# Altium PCB PCB1.PcbDoc
Units mm, origin at the board's own origin, x right, y up, seen from the top; angles counter-clockwise.
Board outline 152.4 x 101.6 mm, 2 copper layers (Top Layer, Bottom Layer); 4 components, 3 nets, 10 pads, 0 vias.
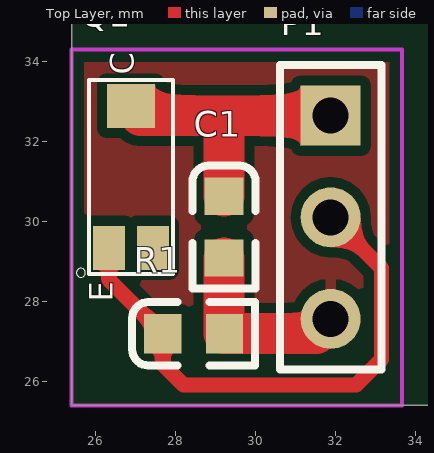
[diagram p0: Top Layer view]
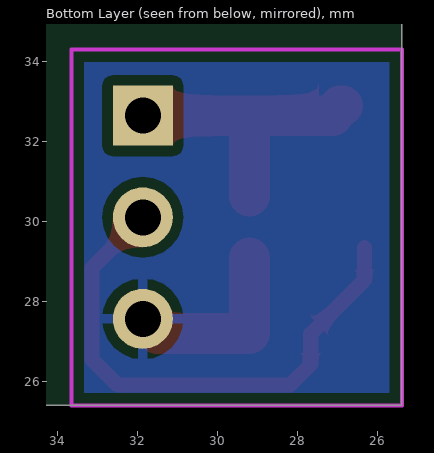
[diagram p1: Bottom Layer view, seen from below]

## Layer stack, top to bottom
Top Solder: solder mask 0.0102, Solder Resist, Dk 3.5
Top Layer: signal copper 0.0356
Dielectric 1: dielectric 0.32, FR-4, Dk 4.8
Bottom Layer: signal copper 0.0356
Bottom Solder: solder mask 0.0102, Solder Resist, Dk 3.5

## Board outline
25.4,25.4 177.8,25.4 177.8,127 25.4,127

## Design rules (kind name [scope] priority, off if disabled: settings)
Clearance [All] p1: gap=0.254 ignorepadtopadclearanceinfootprint=FALSE except(0: Arc-Hole Track-Hole SMDPad-Hole THPad-Hole Via-Hole Fill-Hole Poly-Hole Region-Hole Text-Hole)
PolygonConnect [All] p1: connectstyle=Relief reliefconductorwidth=0.254 reliefentries=4 polygonreliefangle="90 Angle" airgapwidth=0.254
RoutingVias [All] p1: holewidth=0.711 width=1.27 viastyle="Through Hole" minholewidth=0.711 minwidth=1.27 maxholewidth=0.711 maxwidth=1.27
SolderMaskExpansion [All] p1: expansion=0.102
Width [All] p1: maxlimit=1.016 minlimit=0.254 preferedwidth=0.254
30 further rules are at their usual default settings.

## Components (designator, comment, footprint, x,y, rotation, side; value= is the part's Value field where it differs from the comment)
C1 "Cap" 0603 29.21,29.853 r90 top value=0.1uf
P1 "Header 3" HDR1X3 31.877,32.639 r270 top
Q1 "Photo NPN" 1206-TEMT6000 26.882,29.337 r90 top
R1 "Res2" 0603 28.448,27.186 r180 top value=1K

## Footprints (in the part's own frame and the unit in brackets; to place one, negate y for a bottom-side part, rotate by r counter-clockwise, add the part's x,y. Pads: shape width x height; smd on the part's side, far side on the other; paste and mask are expansions set on the pad)
0603 [mm]
  rect 0.93x0.98 smd: 1(-0.77,0) 2(0.77,0)
  silkscreen extent -1.53,-0.79 1.54,0.79, body extent -0.8,-0.4 0.8,0.4, height 0.3
1206-TEMT6000 [mm]
  rect 1.1x1.2 smd: 1(3.55,0)
  rect 1.1x0.8 smd: 2(0,-0.55) 3(0,0.55)
  silkscreen extent -0.74,-1.05 4.2,1.36
HDR1X3 [mm] "Connector; Header; 3 Position"
  rect 1.5x1.5 hole 0.9: 1(0,0)
  round 1.5 hole 0.9: 2(2.54,0) 3(5.08,0)
  silkscreen extent -1.27,-1.27 6.35,1.27

## Part data
C1: "Capacitor", LatestRevisionDate=17-Jul-2002, LatestRevisionNote="Re-released for DXP Platform.", PackageDescription="Radial Cap, Thru-Hole; 2 Leads; 0.3 in Pin Spacing", PackageReference=RAD-0.3, Published=8-Jun-2000, Publisher="Altium Limited"
P1: "Header, 3-Pin", LatestRevisionDate=17-Jul-2002, LatestRevisionNote="Re-released for DXP Platform.", Publisher="Altium Limited"
Q1: "NPN Phototransistor", Code_JEDEC=TO-220-AC, LatestRevisionDate=17-Jul-2002, LatestRevisionNote="Re-released for DXP Platform.", PackageReference=TO-220_A, Published=24-Mar-1999, Publisher="Altium Limited"
R1: "Resistor", LatestRevisionDate=17-Jul-2002, LatestRevisionNote="Re-released for DXP Platform.", PackageDescription="Axial Device, Thru-Hole; 2 Leads; 0.4 in Pin Spacing", PackageReference=AXIAL-0.4, Published=8-Jun-2000, Publisher="Altium Limited"

## Nets (pads, with @x,y where several pads share a name; then routed paths per layer and width w, separated by ;. In a path a pad name is that pad's centre, name@x,y a point inside that pad or via, vN(x,y) a via of type N, cw(c..) or ccw(c..) an arc to the next point about the centre after c; other vN are vias at no path point)
3.3V: C1.2 P1.1 Q1.1 | length 6.6
  Top Layer w1.016: Q1.1 Q1.1@26.946,32.887 ; Q1.1@27.13,32.639 P1.1 ; C1.2 29.21,32.385
GND: C1.1 P1.3 R1.1 | length 4.2
  Top Layer w1.016: C1.1 29.21,27.194 P1.3@31.512,27.194
SIG: P1.2 Q1.3 R1.2 | length 13.5
  Top Layer w0.381: Q1.3 26.332,28.532 R1.2 27.678,26.424 28.194,25.908 32.512,25.908 33.147,26.543 33.147,28.829 P1.2
pads on no net: Q1.2

## Polygon pours and split planes (outlines as drawn)
GND on Top Layer "Keep-Out Layer-No Net" (solid, remove dead copper, pour order 0): 24.511,24.892 33.909,24.892 33.909,35.052 24.765,35.052 24.511,35.306
GND on Bottom Layer "Keep-Out Layer-No Net" (solid, remove dead copper, pour order 2): 24.892,24.892 25.527,24.257 34.925,24.257 34.925,33.909 33.782,35.052 33.655,34.925 25.019,34.925

## Keep-outs
Keep-Out Layer:
  lines w0.1: 25.4,25.4 25.4,34.29 33.655,34.29 33.655,25.4 25.4,25.4

## Text inside footprints (layer, text, board x,y; h text height)
Q1: Top Overlay "E" at 26.632,27.987 h1 r90; Top Overlay "C" at 27.157,33.662 h1 r90